# Altium PCB SMART_IMU.PcbDoc
Units mil, origin at the board's own origin, x right, y up, seen from the top; angles counter-clockwise.
Board outline 1377.95 x 1377.95 mil, 2 copper layers (Top Layer, Bottom Layer); 20 components, 17 nets, 87 pads, 0 vias.
Unrouted connection lines stored in the file: 33.
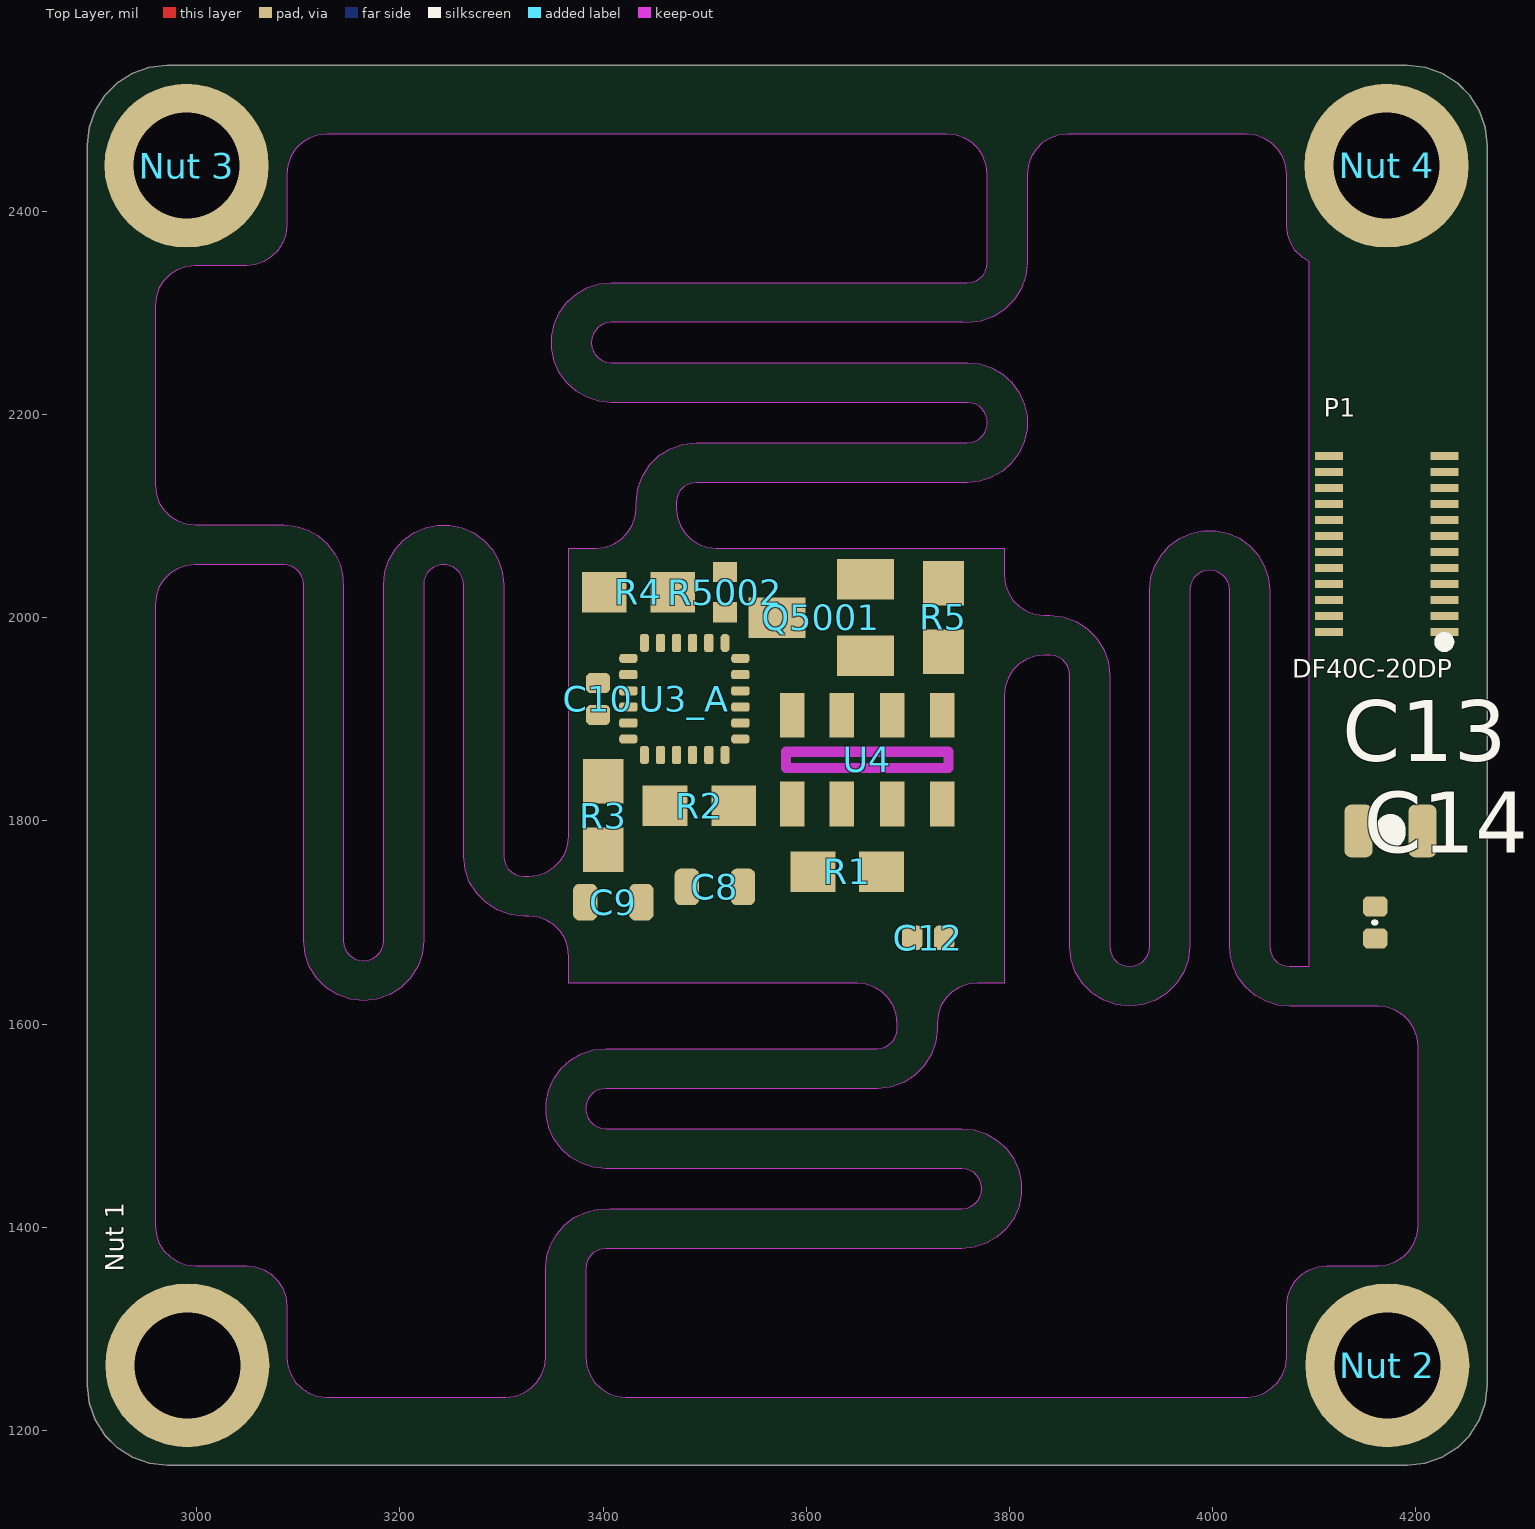
[diagram p0: Top Layer view]
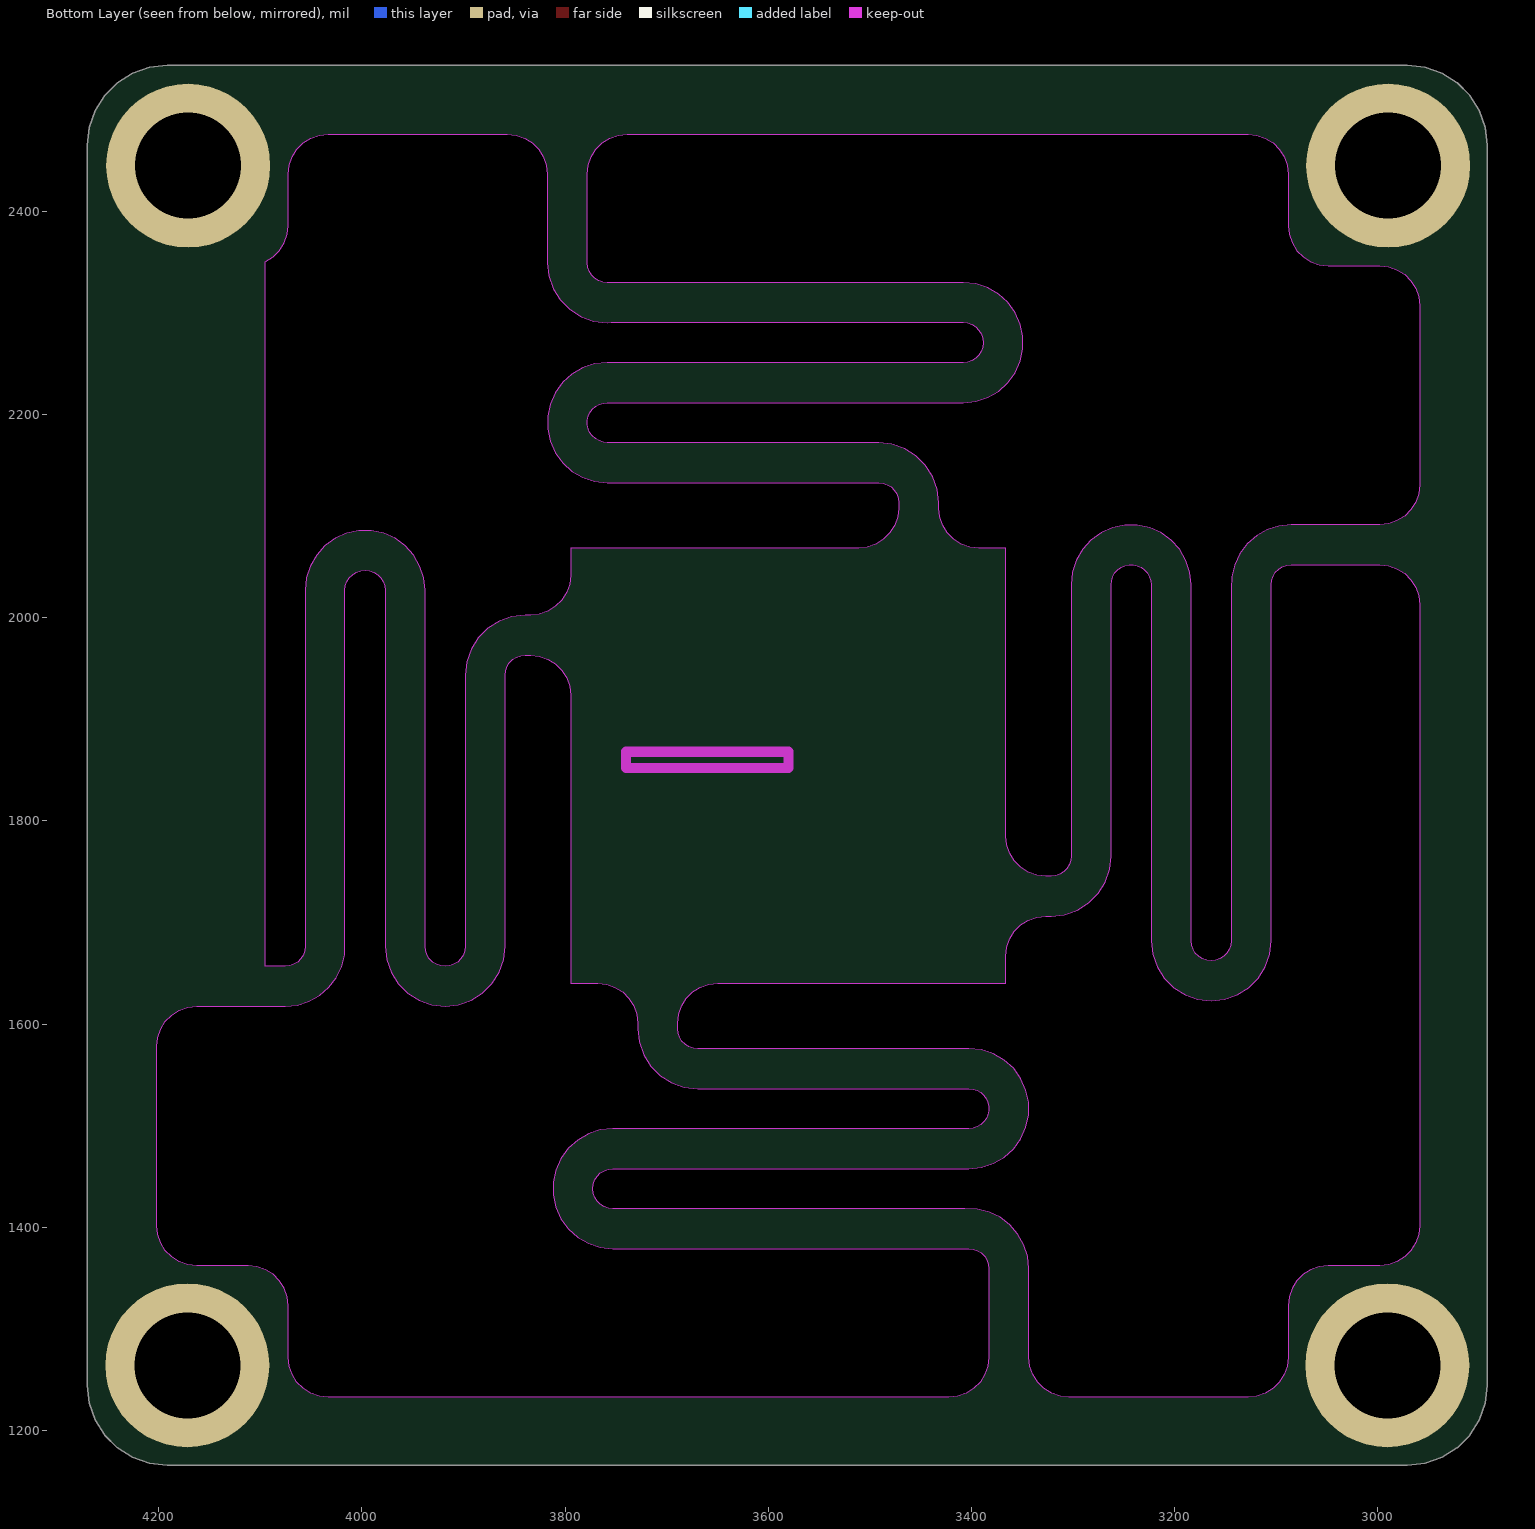
[diagram p1: Bottom Layer view, seen from below]

## Layer stack, top to bottom
Top Solder: solder mask 0.4, Solder Resist, Dk 3.5
Top Layer: signal copper 1.4
Dielectric 1: dielectric 12.6, FR-4, Dk 4.8
Bottom Layer: signal copper 1.4
Bottom Solder: solder mask 0.4, Solder Resist, Dk 3.5

## Board outline
2892.33,2464.95 2894.31,2482.47 2900.13,2499.11 2909.51,2514.04 2921.98,2526.51 2936.91,2535.89 2953.55,2541.71 2971.07,2543.69 4191.55,2543.69 4209.07,2541.71 4225.71,2535.89 4240.64,2526.51 4253.11,2514.04 4262.49,2499.11 4268.31,2482.47 4270.29,2464.95 4270.29,1244.47 4268.31,1226.95 4262.49,1210.31 4253.11,1195.38 4240.64,1182.91 4225.71,1173.53 4209.07,1167.71 4191.55,1165.73 2971.07,1165.73 2953.55,1167.71 2936.91,1173.53 2921.98,1182.91 2909.51,1195.38 2900.13,1210.31 2894.31,1226.95 2892.33,1244.47
cut-out: 3366.42,1666.98 3365.44,1675.74 3362.52,1684.07 3357.83,1691.53 3351.6,1697.76 3344.14,1702.45 3335.81,1705.37 3327.05,1706.35 3321.69,1706.35 3308.54,1707.83 3296.06,1712.2 3284.86,1719.24 3275.51,1728.59 3268.48,1739.79 3264.11,1752.27 3262.63,1765.41 3262.63,2032.43 3262.2,2036.53 3260.93,2040.44 3258.87,2044 3256.12,2047.06 3252.79,2049.48 3249.03,2051.16 3245,2052.01 3240.89,2052.01 3236.86,2051.16 3233.1,2049.48 3229.77,2047.06 3227.02,2044 3224.96,2040.44 3223.69,2036.53 3223.26,2032.43 3223.26,1682.03 3221.78,1668.89 3217.41,1656.41 3210.38,1645.21 3201.03,1635.86 3189.83,1628.83 3177.35,1624.46 3164.2,1622.98 3151.06,1624.46 3138.58,1628.83 3127.38,1635.86 3118.03,1645.21 3111,1656.41 3106.63,1668.89 3105.15,1682.03 3105.15,2032.43 3104.66,2036.81 3103.2,2040.97 3100.86,2044.71 3097.74,2047.82 3094.01,2050.17 3089.85,2051.63 3085.46,2052.12 2998.32,2052.12 2989.56,2051.13 2981.24,2048.22 2973.78,2043.53 2967.54,2037.3 2962.85,2029.83 2959.94,2021.51 2958.95,2012.75 2958.95,1401.69 2959.94,1392.93 2962.85,1384.61 2967.54,1377.15 2973.78,1370.91 2981.24,1366.22 2989.56,1363.31 2998.32,1362.32 3049.06,1362.32 3057.82,1361.34 3066.14,1358.42 3073.6,1353.73 3079.84,1347.5 3084.53,1340.03 3087.44,1331.71 3088.43,1322.95 3088.43,1272.22 3089.41,1263.46 3092.32,1255.14 3097.01,1247.67 3103.25,1241.44 3110.71,1236.75 3119.03,1233.84 3127.8,1232.85 3304.14,1232.85 3312.9,1233.84 3321.22,1236.75 3328.69,1241.44 3334.92,1247.67 3339.61,1255.14 3342.52,1263.46 3343.51,1272.22 3343.51,1359.36 3344.74,1371.37 3348.39,1382.87 3354.3,1393.39 3362.22,1402.49 3371.83,1409.79 3382.73,1414.98 3394.45,1417.86 3406.51,1418.29 3752.92,1418.29 3757.33,1418.78 3761.51,1420.25 3765.25,1422.61 3768.38,1425.75 3770.73,1429.51 3772.18,1433.7 3772.65,1438.1 3772.16,1442.48 3770.7,1446.64 3768.36,1450.38 3765.24,1453.49 3761.51,1455.84 3757.35,1457.29 3752.97,1457.79 3402.57,1457.79 3390.29,1459.08 3378.55,1462.89 3367.85,1469.07 3358.68,1477.33 3351.42,1487.32 3346.4,1498.59 3343.83,1510.67 3343.83,1523.02 3346.4,1535.09 3351.42,1546.37 3358.68,1556.36 3367.85,1564.62 3378.55,1570.79 3390.29,1574.61 3402.57,1575.9 3669.59,1575.9 3673.97,1576.39 3678.13,1577.85 3681.87,1580.19 3684.98,1583.31 3687.33,1587.04 3688.78,1591.2 3689.28,1595.58 3689.28,1600.95 3688.29,1609.71 3685.38,1618.03 3680.69,1625.5 3674.45,1631.73 3666.99,1636.42 3658.67,1639.33 3649.91,1640.32 3366.42,1640.32
cut-out: 3366.42,2068.58 3393.09,2068.58 3401.85,2069.56 3410.17,2072.48 3417.63,2077.17 3423.87,2083.4 3428.56,2090.86 3431.47,2099.19 3432.46,2107.95 3432.46,2113.31 3433.94,2126.46 3438.3,2138.94 3445.34,2150.14 3454.69,2159.49 3465.89,2166.52 3478.37,2170.89 3491.51,2172.37 3758.54,2172.37 3762.63,2172.8 3766.54,2174.07 3770.11,2176.13 3773.17,2178.88 3775.58,2182.21 3777.26,2185.97 3778.11,2190 3778.11,2194.11 3777.26,2198.14 3775.58,2201.9 3773.17,2205.23 3770.11,2207.98 3766.54,2210.04 3762.63,2211.31 3758.54,2211.74 3408.13,2211.74 3395.86,2213.03 3384.11,2216.85 3373.42,2223.02 3364.25,2231.28 3356.99,2241.27 3351.97,2252.55 3349.4,2264.62 3349.4,2276.97 3351.97,2289.04 3356.99,2300.32 3364.25,2310.31 3373.42,2318.57 3384.11,2324.74 3395.86,2328.56 3408.13,2329.85 3758.54,2329.85 3762.92,2330.34 3767.08,2331.8 3770.81,2334.14 3773.93,2337.26 3776.27,2340.99 3777.73,2345.16 3778.22,2349.54 3778.22,2436.68 3777.23,2445.44 3774.32,2453.76 3769.63,2461.22 3763.4,2467.46 3755.93,2472.15 3747.61,2475.06 3738.85,2476.05 3127.8,2476.05 3119.03,2475.06 3110.71,2472.15 3103.25,2467.46 3097.01,2461.22 3092.32,2453.76 3089.41,2445.44 3088.43,2436.68 3088.43,2385.94 3087.44,2377.18 3084.53,2368.86 3079.84,2361.4 3073.6,2355.16 3066.14,2350.47 3057.82,2347.56 3049.06,2346.57 2998.32,2346.57 2989.56,2345.59 2981.24,2342.68 2973.78,2337.99 2967.54,2331.75 2962.85,2324.29 2959.94,2315.97 2958.95,2307.2 2958.95,2130.86 2959.94,2122.1 2962.85,2113.78 2967.54,2106.31 2973.78,2100.08 2981.24,2095.39 2989.56,2092.48 2998.32,2091.49 3085.46,2091.49 3097.47,2090.26 3108.97,2086.61 3119.49,2080.7 3128.59,2072.78 3135.89,2063.17 3141.09,2052.27 3143.96,2040.55 3144.39,2028.49 3144.39,1682.08 3144.88,1677.69 3146.34,1673.52 3148.69,1669.78 3151.82,1666.65 3155.56,1664.3 3159.73,1662.84 3164.12,1662.35 3164.2,1662.35 3168.59,1662.84 3172.75,1664.3 3176.48,1666.64 3179.6,1669.76 3181.94,1673.49 3183.4,1677.65 3183.89,1682.03 3183.89,2032.43 3185.18,2044.71 3189,2056.45 3195.17,2067.15 3203.43,2076.32 3213.42,2083.58 3224.7,2088.6 3236.77,2091.17 3249.12,2091.17 3261.19,2088.6 3272.47,2083.58 3282.46,2076.32 3290.72,2067.15 3296.89,2056.45 3300.71,2044.71 3302,2032.43 3302,1765.41 3302.49,1761.03 3303.95,1756.87 3306.29,1753.13 3309.41,1750.02 3313.14,1747.67 3317.3,1746.22 3321.69,1745.72 3327.05,1745.72 3335.81,1746.71 3344.14,1749.62 3351.6,1754.31 3357.83,1760.55 3362.52,1768.01 3365.44,1776.33 3366.42,1785.09
cut-out: 3768.02,1640.32 3759.26,1639.33 3750.93,1636.42 3743.47,1631.73 3737.24,1625.5 3732.55,1618.03 3729.63,1609.71 3728.65,1600.95 3728.65,1595.58 3727.17,1582.44 3722.8,1569.96 3715.76,1558.76 3706.41,1549.41 3695.21,1542.38 3682.73,1538.01 3669.59,1536.53 3402.57,1536.53 3398.47,1536.1 3394.56,1534.83 3391,1532.77 3387.94,1530.01 3385.52,1526.69 3383.84,1522.93 3382.99,1518.9 3382.99,1514.78 3383.84,1510.76 3385.52,1507 3387.94,1503.67 3391,1500.92 3394.56,1498.86 3398.47,1497.59 3402.57,1497.16 3752.97,1497.16 3765.25,1495.87 3776.99,1492.05 3787.68,1485.88 3796.85,1477.62 3804.11,1467.63 3809.13,1456.35 3811.7,1444.28 3811.7,1431.93 3809.13,1419.85 3804.11,1408.57 3796.85,1398.59 3787.68,1390.33 3776.99,1384.15 3765.25,1380.34 3752.97,1379.05 3402.57,1379.05 3398.19,1378.55 3394.02,1377.1 3390.29,1374.75 3387.18,1371.64 3384.83,1367.9 3383.37,1363.74 3382.88,1359.36 3382.88,1272.22 3383.87,1263.46 3386.78,1255.14 3391.47,1247.67 3397.7,1241.44 3405.17,1236.75 3413.49,1233.84 3422.25,1232.85 4033.31,1232.85 4042.07,1233.84 4050.39,1236.75 4057.85,1241.44 4064.09,1247.67 4068.78,1255.14 4071.69,1263.46 4072.68,1272.22 4072.68,1322.95 4073.66,1331.71 4076.58,1340.03 4081.27,1347.5 4087.5,1353.73 4094.97,1358.42 4103.29,1361.34 4112.05,1362.32 4162.78,1362.32 4171.54,1363.31 4179.86,1366.22 4187.33,1370.91 4193.56,1377.15 4198.25,1384.61 4201.16,1392.93 4202.15,1401.69 4202.15,1578.04 4201.16,1586.8 4198.25,1595.12 4193.56,1602.59 4187.33,1608.82 4179.86,1613.51 4171.54,1616.42 4162.78,1617.41 4075.64,1617.41 4063.63,1618.64 4052.13,1622.29 4041.61,1628.2 4032.51,1636.12 4025.21,1645.73 4020.02,1656.62 4017.14,1668.34 4016.71,1680.4 4016.71,2026.82 4016.22,2031.22 4014.75,2035.4 4012.39,2039.15 4009.25,2042.28 4005.49,2044.62 4001.3,2046.07 3996.9,2046.55 3992.52,2046.06 3988.36,2044.6 3984.62,2042.26 3981.51,2039.14 3979.16,2035.41 3977.71,2031.25 3977.21,2026.87 3977.21,1676.46 3975.73,1663.32 3971.36,1650.84 3964.33,1639.64 3954.98,1630.29 3943.78,1623.26 3931.3,1618.89 3918.16,1617.41 3905.02,1618.89 3892.53,1623.26 3881.34,1630.29 3871.99,1639.64 3864.95,1650.84 3860.58,1663.32 3859.1,1676.46 3859.1,1943.49 3858.61,1947.87 3857.15,1952.03 3854.81,1955.76 3851.69,1958.88 3847.96,1961.22 3843.8,1962.68 3839.42,1963.17 3834.05,1963.17 3825.29,1962.19 3816.97,1959.28 3809.5,1954.59 3803.27,1948.35 3798.58,1940.89 3795.67,1932.56 3794.68,1923.8 3794.68,1640.32
cut-out: 3794.68,2068.58 3794.68,2041.91 3795.67,2033.15 3798.58,2024.83 3803.27,2017.37 3809.5,2011.13 3816.97,2006.44 3825.29,2003.53 3834.05,2002.54 3839.42,2002.54 3852.56,2001.06 3865.04,1996.7 3876.24,1989.66 3885.59,1980.31 3892.62,1969.11 3896.99,1956.63 3898.47,1943.49 3898.47,1676.46 3898.97,1672.08 3900.42,1667.92 3902.77,1664.19 3905.88,1661.07 3909.62,1658.73 3913.78,1657.27 3918.16,1656.78 3922.54,1657.27 3926.7,1658.73 3930.43,1661.07 3933.55,1664.19 3935.89,1667.92 3937.35,1672.08 3937.84,1676.46 3937.84,2026.87 3939.13,2039.14 3942.95,2050.89 3949.12,2061.58 3957.38,2070.75 3967.37,2078.01 3978.65,2083.03 3990.72,2085.6 4003.07,2085.6 4015.15,2083.03 4026.43,2078.01 4036.41,2070.75 4044.67,2061.58 4050.85,2050.89 4054.66,2039.14 4055.95,2026.87 4055.95,1676.46 4056.45,1672.08 4057.9,1667.92 4060.25,1664.19 4063.36,1661.07 4067.1,1658.73 4071.26,1657.27 4075.64,1656.78 4094.97,1656.78 4094.97,1899.58 4094.96,2350.47 4087.5,2355.16 4081.27,2361.4 4076.58,2368.86 4073.66,2377.18 4072.68,2385.94 4072.68,2436.68 4071.69,2445.44 4068.78,2453.76 4064.09,2461.22 4057.85,2467.46 4050.39,2472.15 4042.07,2475.06 4033.31,2476.05 3856.96,2476.05 3848.2,2475.06 3839.88,2472.15 3832.41,2467.46 3826.18,2461.22 3821.49,2453.76 3818.58,2445.44 3817.59,2436.68 3817.59,2349.54 3816.11,2336.39 3811.74,2323.91 3804.71,2312.72 3795.36,2303.36 3784.16,2296.33 3771.68,2291.96 3758.54,2290.48 3754.6,2290.61 3408.18,2290.61 3403.78,2290.11 3399.6,2288.65 3395.85,2286.28 3392.72,2283.14 3390.38,2279.39 3388.93,2275.2 3388.45,2270.8 3388.94,2266.41 3390.4,2262.25 3392.74,2258.52 3395.86,2255.4 3399.59,2253.06 3403.75,2251.6 3408.13,2251.11 3758.54,2251.11 3770.81,2249.82 3782.56,2246 3793.25,2239.83 3802.42,2231.57 3809.68,2221.58 3814.7,2210.3 3817.27,2198.23 3817.27,2185.88 3814.7,2173.81 3809.68,2162.53 3802.42,2152.54 3793.25,2144.28 3782.56,2138.11 3770.81,2134.29 3758.54,2133 3491.51,2133 3487.13,2132.51 3482.97,2131.05 3479.24,2128.71 3476.12,2125.59 3473.78,2121.86 3472.32,2117.7 3471.83,2113.31 3471.83,2107.95 3472.81,2099.19 3475.72,2090.86 3480.42,2083.4 3486.65,2077.17 3494.11,2072.48 3502.44,2069.56 3511.2,2068.58

## Design rules (kind name [scope] priority, off if disabled: settings)
Clearance [All] p1: gap=10
PolygonConnect [All] p1: connectstyle=Relief reliefconductorwidth=10 reliefentries=4 polygonreliefangle="90 Angle" airgapwidth=10
RoutingVias [All] p1: holewidth=28 width=50 viastyle="Through Hole" minholewidth=28 minwidth=50 maxholewidth=28 maxwidth=50
SolderMaskExpansion [All] p1: expansion=4
Width [All] p1: maxlimit=10 minlimit=10 preferedwidth=10
30 further rules are at their usual default settings.

## Classes and differential pairs
component class SMART_IMU: C8 C9 C10 C12 C13 C14 "Nut 1" "Nut 3" "Nut 4" Q5001 R1 R2 R3 R4 R5 R5002 U3_A U4

## Components (designator, comment, footprint, x,y, rotation, side; value= is the part's Value field where it differs from the comment)
C8 "2u2" 0603-CAP 3510,1735 r0 top
C9 "2u2" 0603-CAP 3410,1720 r0 top
C10 "0u1" 0402-CAP 3395,1920 r90 top
C12 "0u1" 0402-CAP 3720,1685 r0 top
C13 "10u" 0805-CAP 4175,1790 r0 top
C14 "0u1" 0402-CAP 4160,1700 r90 top
"Nut 1" "PEM-SMTSO-M1.6-2-ET" PEM-SMTSO-M1.6-2-ET 2990.76,1264.16 r180 top
"Nut 2" "PEM-SMTSO-M1.6-2-ET" PEM-SMTSO-M1.6-2-ET 4171.86,1264.16 r180 top
"Nut 3" "PEM-SMTSO-M1.6-2-ET" PEM-SMTSO-M1.6-2-ET 2990,2445 r180 top
"Nut 4" "PEM-SMTSO-M1.6-2-ET" PEM-SMTSO-M1.6-2-ET 4171.1,2445 r180 top
P1 "DF40C-20DP" DF40C-20-DP 4171.1,2072.56 r180 top locked
Q5001 "MMBT3906*SMD" SOT23-BEC 3615,2000 r90 top
R1 "Resistor" R0603 3640,1750 r0 top
R2 "Resistor" R0603 3495,1815 r180 top
R3 "Resistor" R0603 3400,1805 r90 top
R4 "Resistor" R0603 3435,2025 r180 top
R5 "Resistor" R0603 3735,2000 r90 top
R5002 "1K8" 0402-RES 3520,2025 r90 top
U3_A "MPU-9250" MPU-9250 3480,1920 r0 top
U4 "MS5611-01BA" MS5611-01BA 3660,1860 r90 top

## Footprints (in the part's own frame and the unit in brackets; to place one, negate y for a bottom-side part, rotate by r counter-clockwise, add the part's x,y. Pads: shape width x height; smd on the part's side, far side on the other; paste and mask are expansions set on the pad)
0402-CAP [mil]
  rrect50% 20x24 smd mask+0: P$1(-15.75,0) P$2(15.75,0)
  body extent -20,-10 20,10, height 20
0402-RES [mil] "0402-RES"
  rect 20x24 smd: P$1(-19.68,0) P$2(20,0)
  body extent -20,-10 20,10, height 20
0603-CAP [mil] "0603-CAP"
  rrect50% 24x36 smd mask+0: P$1(-27.56,0) P$2(27.56,0)
  body extent -31,-16 31,16, height 34
0805-CAP [mil]
  rrect50% 28x52 smd mask+0: P$1(-31.5,0) P$2(31.5,0)
  silkscreen extent 0,-2 0,2, body extent -39,-25 39,25, height 31
DF40C-20-DP [mm]
  rect 0.7x0.2 smd mask+0: 1(-1.444,1.8) 2(1.436,1.8) 3(-1.444,1.4) 4(1.436,1.4) 5(-1.444,1) 6(1.436,1) 7(-1.444,0.6) 8(1.436,0.6) 9(-1.444,0.2) 10(1.436,0.2) 11(-1.444,-0.2) 12(1.436,-0.2) 13(-1.444,-0.6) 14(1.436,-0.6) 15(-1.444,-1) 16(1.436,-1) 17(-1.444,-1.4) 18(1.436,-1.4) 19(-1.444,-1.8) 20(1.436,-1.8) 21(-1.444,-2.2) 22(1.436,-2.2) 23(-1.444,2.2) 24(1.436,2.2)
  silkscreen extent -1.57,2.33 -1.32,2.57, body extent -1.47,-2.76 1.5,2.76, height 1.09
MPU-9250 [mil] "MPU-9250"
  rrect70% 17.99x9 smd mask+1.97: 1(-55.12,40) 6(-55.12,-39.37) 13(55.12,-39.37) 18(55.12,40)
  rrect50% 17.99x9 smd mask+1.97: 2(-55.12,24) 3(-55.12,8) 4(-55.12,-7.87) 5(-55.12,-23.62) 14(55.12,-23.62) 15(55.12,-7.87) 16(55.12,8) 17(55.12,24)
  rrect70% 9x17.99 smd mask+1.97: 7(-39.37,-55.12) 12(40,-55.12) 24(-39.37,55.12)
  rrect50% 9x17.99 smd mask+1.97: 8(-23.62,-55.12) 9(-7.87,-55.12) 10(8,-55.12) 11(24,-55.12) 20(24,55.12) 21(8,55.12) 22(-7.87,55.12) 23(-23.62,55.12)
  rrect90% 9x17.99 smd mask+1.97: 19(40,55.12)
MS5611-01BA [mil] "MS5611-01BA"
  rect 44x24 smd: 1(-43.31,74) 2(-43.31,25) 3(-43.31,-24.61) 4(-43.31,-73.82) 5(44,-73.82) 6(44,-24.61) 7(44,25) 8(44,74)
  Keep-Out Layer lines w10: -8,80 8,80 8,-80 -8,-80 -8,80
  body extent -59,-98 59,99, height 39
PEM-SMTSO-M1.6-2-ET [mm] "Surface mount thread"
  round 4.1 hole 2.65 paste-2 mask-2: 0(0,0)
  body extent -1.59,-1.83 1.59,1.83, height 2
R0603 [mil]
  rect 44x40 smd: 1(-33.46,0) 2(34,0)
  body extent -31,-16 32,16, height 18
SOT23-BEC [mil] "SOT23-BEC"
  rect 40x56 smd: B(-37.4,-43.31) C(0,44) E(38,-43.31)
  body extent -57,-55 57,55, height 51

## Part data
C8 C9: library part CAPACITOR-0603, "Capacitor, 2.2uF, 16V, 10%, X6S, 0603, Ceramic"
C10 C12 C14: library part CAPACITOR-0402, "Capacitor, 0.1uF, 16V, Y5V, 0402, Ceramic"
C13: library part CAPACITOR-0805, "Capacitor, 10uF, 10V, Y5V, 0805, Ceramic"
"Nut 1" "Nut 2" "Nut 3" "Nut 4": "Fastener, M1.6x2mm, SMTSO, Carbon Steel"
P1: "Connector, HDR, 20Pos, 0.4mm, SMD, GOLD"
Q5001: "TRANSISTOR SWITCHING PNP SOT-23"
R1 R2 R3 R4 R5: "RES SMD 5.1 OHM 5% 1/4W 0603"
R5002: library part RESISTOR0402-RES, "RES 1.8K OHM 1/16W 1% 0402"
U3_A: library part MPU-6500
U4: "Board, Digital pressure sensor I2C/SPI"

## Nets (pads, with @x,y where several pads share a name; then routed paths per layer and width w, separated by ;. In a path a pad name is that pad's centre, name@x,y a point inside that pad or via, vN(x,y) a via of type N, cw(c..) or ccw(c..) an arc to the next point about the centre after c; other vN are vias at no path point)
+3V3: C9.P$1 C10.P$1 C12.P$1 C13.P$1 C14.P$1 R5.1 U3_A.8 U3_A.13 U4.1
A\C\C\E\L\_\M\A\G\_\C\S\: 
B\A\R\O\_\C\S\: U4.5
G\Y\R\O\_\C\S\: 
GND: "Nut 1.0" "Nut 2.0" "Nut 3.0" "Nut 4.0" C8.P$2 C9.P$2 C10.P$2 C12.P$2 C13.P$2 C14.P$2 R1.1 U3_A.11 U3_A.18 U3_A.20 U4.2 U4.3
IMU_MISO: U3_A.9 U4.6
IMU_MOSI: U3_A.24 U4.7
IMU_SCK: U3_A.23 U4.8
IMU_TEMPERATURE_CONTROL: R5002.P$2
M\P\U\_\C\S\: U3_A.22
NetQ5001_B: Q5001.B R5002.P$1
NetQ5001_C: Q5001.C R4.1
NetQ5001_E: Q5001.E R5.2
NetR1_2: R1.2 R2.1
NetR2_2: R2.2 R3.1
NetR3_2: R3.2 R4.2
REGOUT: C8.P$1 U3_A.10
pads on no net: P1.1 P1.2 P1.3 P1.4 P1.5 P1.6 P1.7 P1.8 P1.9 P1.10 P1.11 P1.12 P1.13 P1.14 P1.15 P1.16 P1.17 P1.18 P1.19 P1.20 P1.21 P1.22 P1.23 P1.24 U3_A.1 U3_A.2 U3_A.3 U3_A.4 U3_A.5 U3_A.6 U3_A.7 U3_A.12 U3_A.14 U3_A.15 U3_A.16 U3_A.17 U3_A.19 U3_A.21 U4.4

## Text inside footprints (layer, text, board x,y; h text height)
U3_A: Mechanical 16 "Y" at 3450.47,1944.61 h10.2; Mechanical 16 "Z" at 3446.54,1883.58 h10.2; Mechanical 16 "X" at 3492.8,1899.33 h10.2